# Altium PCB MICRO.PcbDoc
Units mm, origin at the board's own origin, x right, y up, seen from the top; angles counter-clockwise.
Board outline 122.31 x 71.26 mm, 2 copper layers (Top Layer, Bottom Layer); 42 components, 72 nets, 159 pads, 0 vias.
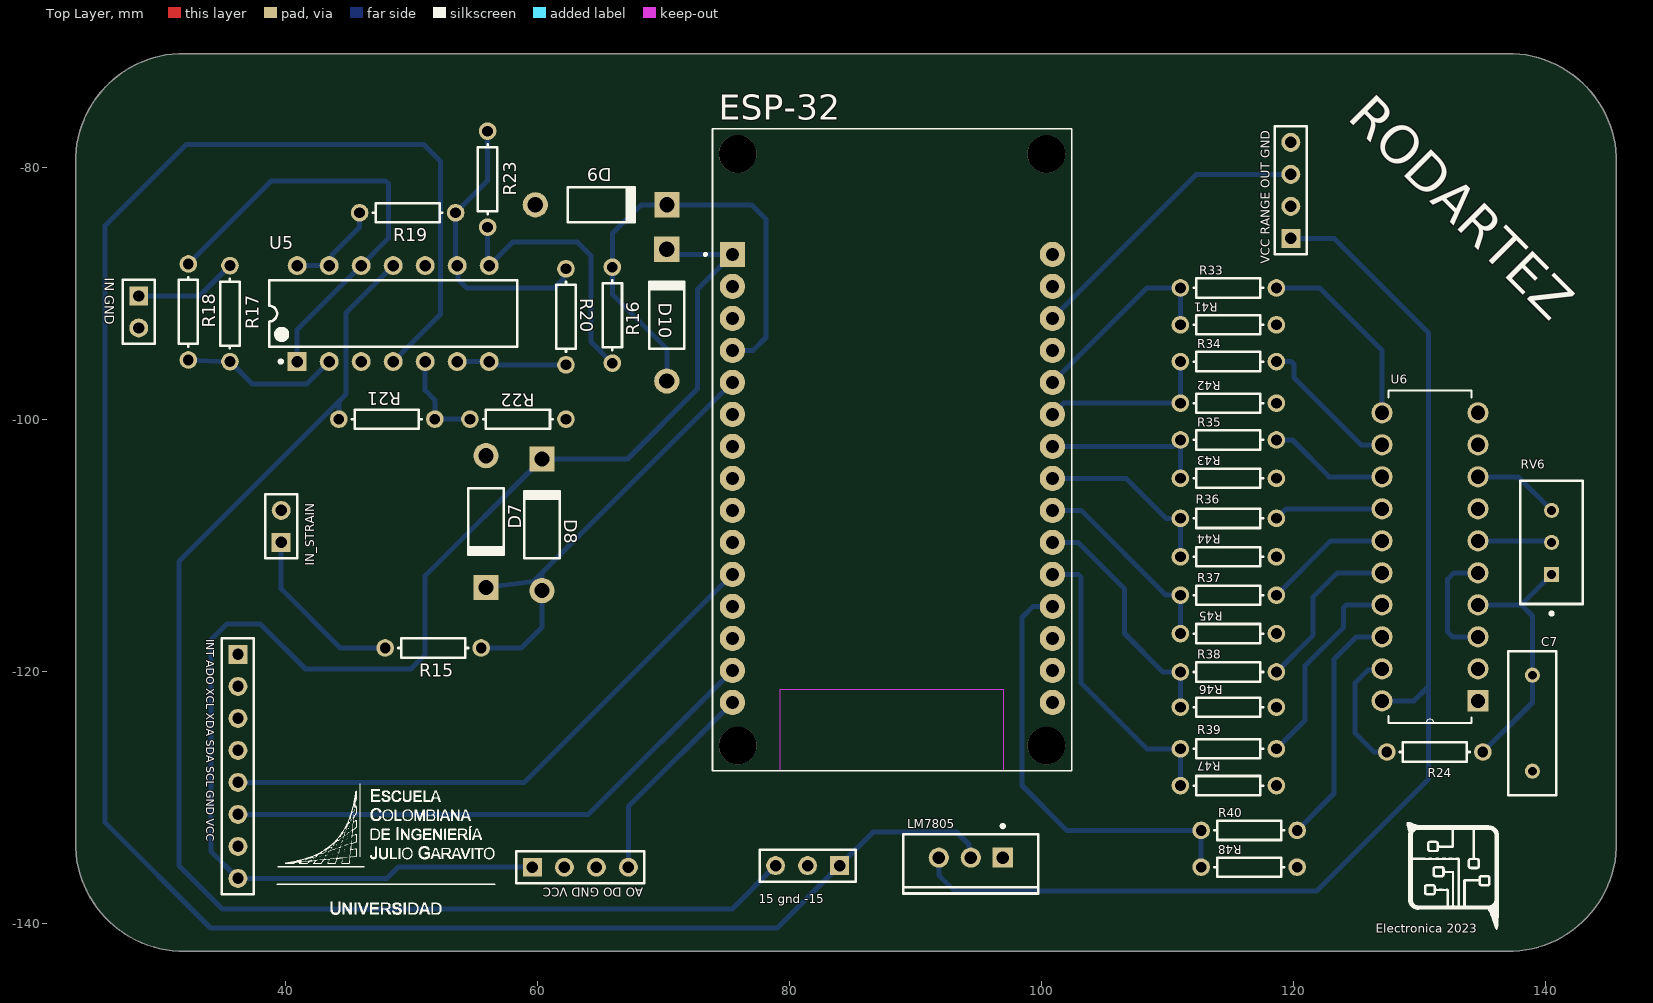
[diagram p0: Top Layer view]
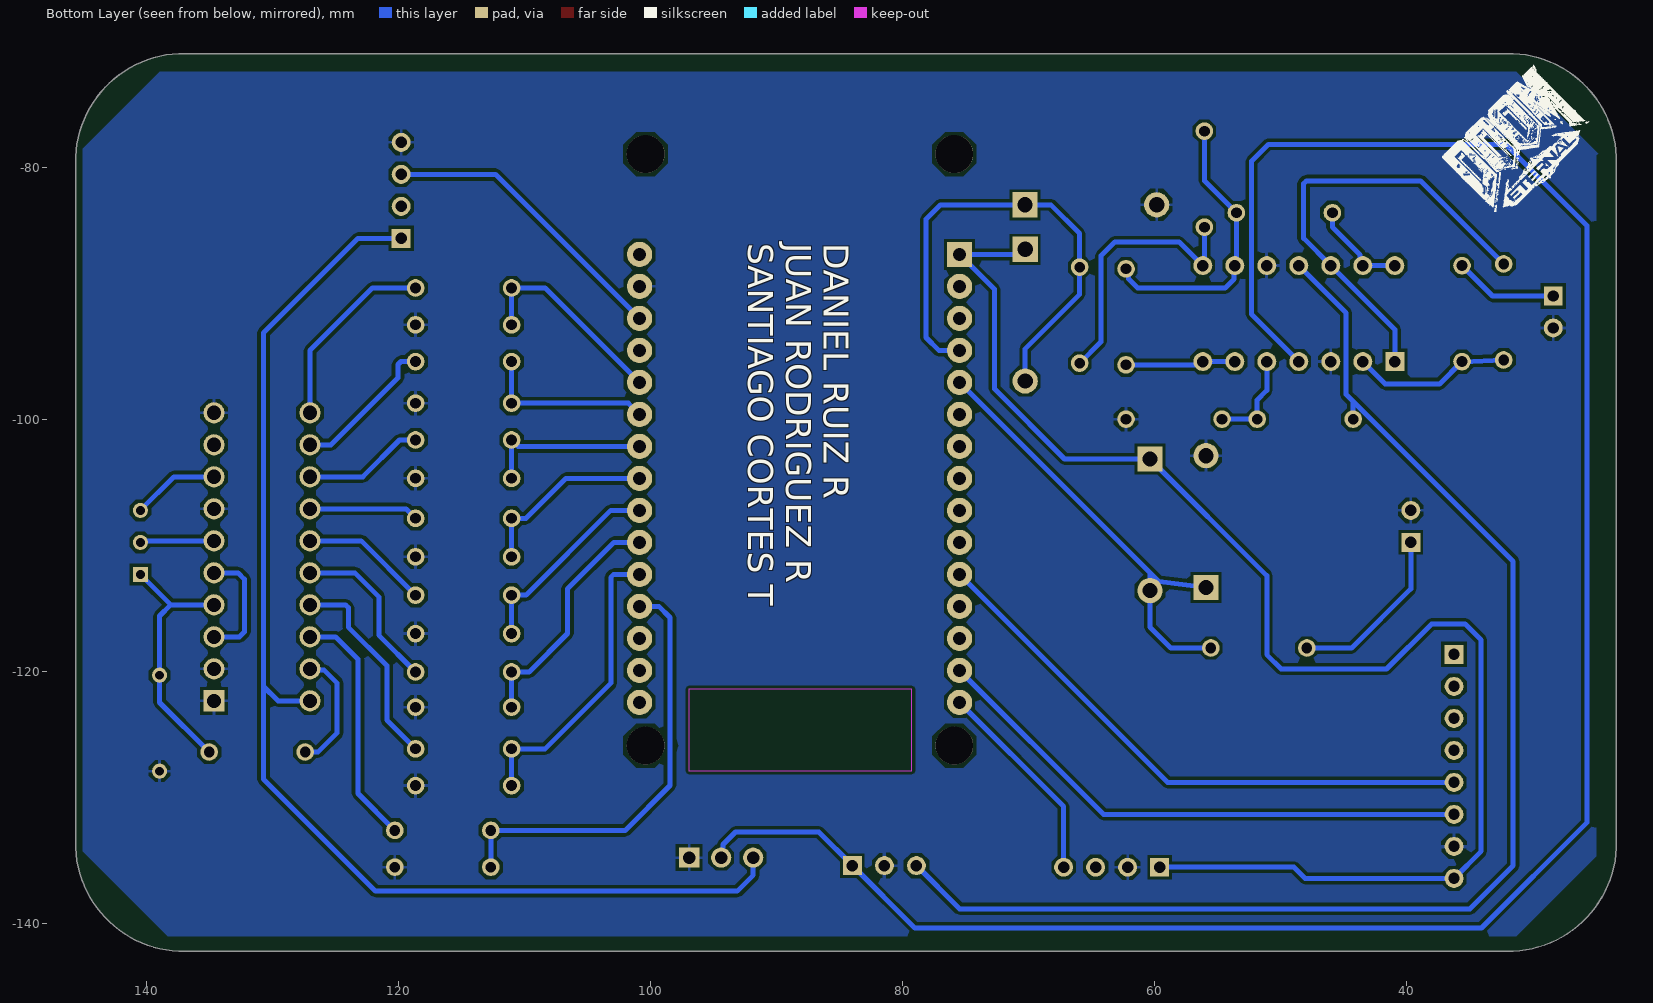
[diagram p1: Bottom Layer view, seen from below]

## Layer stack, top to bottom
Top Solder: solder mask 0.0102, Solder Resist, Dk 3.5
Top Layer: signal copper 0.0356
Dielectric 1: dielectric 0.32, FR-4, Dk 4.8
Bottom Layer: signal copper 0.0356
Bottom Solder: solder mask 0.0102, Solder Resist, Dk 3.5

## Board outline
23.303,-133.478 ccw(c31.877,-133.604) 32.003,-142.178 136.907,-142.178 136.907,-142.181 ccw(c137.033,-133.604) 145.61,-133.478 145.61,-79.628 145.607,-79.628 ccw(c137.033,-79.502) 136.907,-70.928 136.904,-70.925 32.003,-70.925 ccw(c31.877,-79.502) 23.3,-79.628 23.3,-131.445 23.303,-131.448

## Design rules (kind name [scope] priority, off if disabled: settings)
Clearance Clearance_1 [All] p1: gap=0.25 ignorepadtopadclearanceinfootprint=FALSE
Clearance Clearance_GND [InNet('GND') vs InNet('GND')] p2: gap=0.25 ignorepadtopadclearanceinfootprint=FALSE
PolygonConnect [All] p1: connectstyle=Relief reliefconductorwidth=0.254 reliefentries=4 polygonreliefangle="90 Angle" airgapwidth=0.254
RoomDefinition [InComponentClass('Room Definition1') vs False] p1: confinementstyle=ConfineIn formatcopy=TRUE lockcomponents=FALSE outline 31.242,-72.39 24.765,-78.867 24.765,-134.493 31.242,-140.97 138.303,-140.97 145.034,-134.239 145.034,-78.486 138.938,-72.39
RoutingLayers [All] p1: top layer_v5=FALSE bottom layer_v5=TRUE
RoutingVias [All] p1: holewidth=0.711 width=1.27 viastyle="Through Hole" minholewidth=0.711 minwidth=1.27 maxholewidth=0.711 maxwidth=1.27
SolderMaskExpansion [All] p1: expansion=0.102 istentingtop=FALSE
Width [All] p1: maxlimit=1 minlimit=0.254 preferedwidth=0.4 minimp=50.000000 maximp=50.000000 favimp=50.000000
29 further rules are at their usual default settings.

## Classes and differential pairs
component class "Room Definition1": "15 gnd -15" "AO DO GND VCC" D7 D8 D9 D10 ESP-32 "IN GND" IN_STRAIN "INT ADO XCL XDA SDA SCL GND VCC" LM7805 R15 R16 R17 R18 R19 R20 R21 R22 R23 R24 R33 R34 R35 R36 R37 R38 R39 R41 R42 R43 R44 R45 R46 R47 R48 RV6 U5 "VCC RANGE OUT GND"
component class Micro: "15 gnd -15" "AO DO GND VCC" D7 D8 D9 D10 ESP-32 "IN GND" IN_STRAIN "INT ADO XCL XDA SDA SCL GND VCC" LM7805 R15 R16 R17 R18 R19 R20 R21 R22 R23 R24 R33 R34 R35 R36 R37 R38 R39 R41 R42 R43 R44 R45 R46 R47 R48 RV6 U5 "VCC RANGE OUT GND"

## Components (designator, comment, footprint, x,y, rotation, side; value= is the part's Value field where it differs from the comment)
"15 gnd -15" "Header 3" HDR1X3 83.947,-135.382 r180 top
"AO DO GND VCC" "Header 4" HDR1X4 59.563,-135.509 r0 top (schematic designator ENCODER)
C7 "Cap" RAD-0.3 138.938,-124.079 r270 top value=100pF
D7 "Diode 1N4004" DO-41 55.88,-108.077 r270 top
D8 "Diode 1N4004" DO-41 60.325,-108.331 r90 top
D9 "Diode 1N4004" DO-41 65.024,-82.931 r0 top
D10 "Diode 1N4004" DO-41 70.231,-91.694 r90 top
ESP-32 "ESP32-DEVKIT-V1" MODULE_ESP32_DEVKIT_V1 88.138,-102.383 r0 top (schematic designator U4)
"IN GND" "Header 2" HDR1X2 28.321,-90.17 r270 top (schematic designator IN_NTC)
IN_STRAIN "Header 2" HDR1X2 39.624,-109.728 r90 top
"INT ADO XCL XDA SDA SCL GND VCC" "Header 8" HDR1X8 36.195,-118.618 r270 top (schematic designator IMU)
LM7805 "LM7905CT/NOPB" NDE0003A 94.361,-134.747 r180 top (schematic designator LM1)
R15 "Res1" AXIAL-0.3 51.689,-118.11 r0 top value=1K
R16 "Res1" AXIAL-0.3 65.913,-91.694 r90 top value=1K
R17 "Res1" AXIAL-0.3 35.56,-91.567 r270 top value=1K
R18 "Res1" AXIAL-0.3 32.258,-91.44 r90 top value=1K
R19 "Res1" AXIAL-0.3 49.657,-83.566 r0 top value=1K
R20 "Res1" AXIAL-0.3 62.23,-91.821 r90 top value=1K
R21 "Res1" AXIAL-0.3 48.006,-99.949 r180 top value=1K
R22 "Res1" AXIAL-0.3 58.42,-99.949 r0 top value=1K
R23 "Res1" AXIAL-0.3 56.007,-80.899 r270 top value=1K
R24 "Res1" AXIAL-0.3 131.191,-126.365 r180 top value=1K
R33 "Res1" AXIAL-0.3 114.808,-89.535 r180 top value=1.8k
R34 "Res1" AXIAL-0.3 114.808,-95.377 r180 top value=1.8k
R35 "Res1" AXIAL-0.3 114.808,-101.6 r180 top value=1.8k
R36 "Res1" AXIAL-0.3 114.808,-107.823 r180 top value=1.8k
R37 "Res1" AXIAL-0.3 114.808,-113.919 r180 top value=1.8k
R38 "Res1" AXIAL-0.3 114.808,-120.015 r180 top value=1.8k
R39 "Res1" AXIAL-0.3 114.808,-126.111 r180 top value=1.8k
R40 "Res1" AXIAL-0.3 116.459,-132.588 r180 top value=1.8k
R41 "Res1" AXIAL-0.3 114.808,-92.456 r0 top value=3.3k
R42 "Res1" AXIAL-0.3 114.808,-98.679 r0 top value=3.3k
R43 "Res1" AXIAL-0.3 114.808,-104.648 r0 top value=3.3k
R44 "Res1" AXIAL-0.3 114.808,-110.871 r0 top value=3.3k
R45 "Res1" AXIAL-0.3 114.808,-116.967 r0 top value=3.3k
R46 "Res1" AXIAL-0.3 114.808,-122.809 r0 top value=3.3k
R47 "Res1" AXIAL-0.3 114.808,-129.032 r0 top value=3.3k
R48 "Res1" AXIAL-0.3 116.459,-135.509 r0 top value=3.3k
RV6 "3296W-1-504LF" FP-3296W-MFG 140.457,-109.728 r270 top value=725
U5 "LF347N" N0014A 48.514,-91.567 r90 top
U6 "ADC0804LCN" DIP254P762X508-20 127,-99.441 r180 top
"VCC RANGE OUT GND" "Header 4" HDR1X4 119.761,-85.598 r90 top (schematic designator ultrasonido)

## Footprints (in the part's own frame and the unit in brackets; to place one, negate y for a bottom-side part, rotate by r counter-clockwise, add the part's x,y. Pads: shape width x height; smd on the part's side, far side on the other; paste and mask are expansions set on the pad)
AXIAL-0.3 [mm] "Axial Device, Thru-Hole; 2 Leads; 0.3 in Pin Spacing"
  round 1.4 hole 0.85: 1(-3.81,0) 2(3.81,0)
  silkscreen extent -2.77,-0.76 2.77,0.76
DIP254P762X508-20 [mil]
  rect 66x66 hole 44: 1(-300,900)
  round 66 hole 44: 2(-300,800) 3(-300,700) 4(-300,600) 5(-300,500) 6(-300,400) 7(-300,300) 8(-300,200) 9(-300,100) 10(-300,0) 11(0,0) 12(0,100) 13(0,200) 14(0,300) 15(0,400) 16(0,500) 17(0,600) 18(0,700) 19(0,800) 20(0,900)
  silkscreen extent -280,-70 -20,970
DO-41 [mm] "Diode, Axial; Body 5.2 x 2.7 mm (LxDia. max), Lead Dia. 0.86 mm (max)"
  round 2 hole 1.2: 1(-5.23,0)
  rect 2x2 hole 1.2: 2(5.23,0)
  silkscreen extent -2.65,-1.4 2.75,1.4
FP-3296W-MFG [mm]
  rect 1.2x1.2 hole 0.7 paste-2539.97 mask+0: 1(2.54,0.005)
  round 1.2 hole 0.7 paste-2539.97 mask+0: 2(0,0.005) 3(-2.54,0.005)
  silkscreen extent -4.89,-2.48 5.77,2.48, body extent -4.99,-2.58 4.99,2.58, height 0.25
HDR1X2 [mm] "Connector; Header; 2 Position"
  rect 1.5x1.5 hole 0.9: 1(0,0)
  round 1.5 hole 0.9: 2(2.54,0)
  silkscreen extent -1.27,-1.27 3.81,1.27
HDR1X3 [mm] "Connector; Header; 3 Position"
  rect 1.5x1.5 hole 0.9: 1(0,0)
  round 1.5 hole 0.9: 2(2.54,0) 3(5.08,0)
  silkscreen extent -1.27,-1.27 6.35,1.27
HDR1X4 [mm] "Connector; Header; 4 Position"
  rect 1.5x1.5 hole 0.9: 1(0,0)
  round 1.5 hole 0.9: 2(2.54,0) 3(5.08,0) 4(7.62,0)
  silkscreen extent -1.27,-1.27 8.89,1.27
HDR1X8 [mm] "Connector; Header; 8 Position"
  rect 1.5x1.5 hole 0.9: 1(0,0)
  round 1.5 hole 0.9: 2(2.54,0) 3(5.08,0) 4(7.62,0) 5(10.16,0) 6(12.7,0) 7(15.24,0) 8(17.78,0)
  silkscreen extent -1.27,-1.27 19.05,1.27
MODULE_ESP32_DEVKIT_V1 [mm]
  rect 2x2 / inner round 2 / far side rect 2x2 hole 1.02: 1(-12.7,15.515)
  round 2 hole 1.02: 2(-12.7,12.975) 3(-12.7,10.435) 4(-12.7,7.895) 5(-12.7,5.355) 6(-12.7,2.815) 7(-12.7,0.275) 8(-12.7,-2.265) 9(-12.7,-4.805) 10(-12.7,-7.345) 11(-12.7,-9.885) 12(-12.7,-12.425) 13(-12.7,-14.965) 14(-12.7,-17.505) 15(-12.7,-20.045) 16(12.7,-20.045) 17(12.7,-17.505) 18(12.7,-14.965) 19(12.7,-12.425) 20(12.7,-9.885) 21(12.7,-7.345) 22(12.7,-4.805) 23(12.7,-2.265) 24(12.7,0.275) 25(12.7,2.815) 26(12.7,5.355) 27(12.7,7.895) 28(12.7,10.435) 29(12.7,12.975) 30(12.7,15.515)
  round 3 hole 3 unplated: ""(-12.28,-23.475) ""(-12.28,23.475) ""(12.23,-23.475) ""(12.23,23.475)
  Keep-Out Layer region: 8.78,-25.475 -8.91,-25.475 -8.91,-18.985 8.78,-18.985
  Keep-Out Layer region: 8.78,-25.475 -8.91,-25.475 -8.91,-18.985 8.78,-18.985
  silkscreen extent -14.95,-25.47 14.23,25.47
N0014A [mm] "DIP, 14-Leads, Body 19.7x6.6mm, Pitch 2.54mm"
  rect 1.5x1.5 hole 0.9: 1(-3.81,7.62)
  round 1.5 hole 0.9: 2(-3.81,5.08) 3(-3.81,2.54) 4(-3.81,0) 5(-3.81,-2.54) 6(-3.81,-5.08) 7(-3.81,-7.62) 8(3.81,-7.62) 9(3.81,-5.08) 10(3.81,-2.54) 11(3.81,0) 12(3.81,2.54) 13(3.81,5.08) 14(3.81,7.62)
  silkscreen extent -3.93,-9.85 2.65,9.85, body extent -3.95,-9.85 3.95,9.85, height 5.08
NDE0003A [mm] "FM, 3-Leads, Body 10.7x4.7mm, Pitch 2.54mm"
  rect 1.6x1.6 hole 1: 1(-2.54,0)
  round 1.6 hole 1: 2(0,0) 3(2.54,0)
  silkscreen extent -5.35,-2.62 5.35,2.85, body extent -5.4,-1.9 5.4,2.9, height 19.4
RAD-0.3 [mm] "Radial Cap, Thru-Hole; 2 Leads; 0.3 in Pin Spacing"
  round 1.2 hole 0.7: 1(-3.81,0) 2(3.81,0)
  silkscreen extent -5.71,-1.91 5.71,1.91

## Part data
"15 gnd -15": "Header, 3-Pin", LatestRevisionDate=17-Jul-2002, LatestRevisionNote="Re-released for DXP Platform.", Publisher="Altium Limited"
"AO DO GND VCC" "VCC RANGE OUT GND": "Header, 4-Pin", LatestRevisionDate=17-Jul-2002, LatestRevisionNote="Re-released for DXP Platform.", Publisher="Altium Limited"
C7: "Capacitor", LatestRevisionDate=17-Jul-2002, LatestRevisionNote="Re-released for DXP Platform.", PackageDescription="Radial Cap, Thru-Hole; 2 Leads; 0.3 in Pin Spacing", PackageReference=RAD-0.3, Published=8-Jun-2000, Publisher="Altium Limited"
D7 D8 D9 D10: "1 Amp General Purpose Rectifier", Code_JEDEC=DO-204-AL, ComponentLink1Description="Manufacturer Link", ComponentLink1URL=http://www.fairchildsemi.com/, ComponentLink2Description=Datasheet, ComponentLink2URL=http://www.fairchildsemi.com/ds/1N%2F1N4001.pdf, DatasheetVersion=1998, LatestRevisionDate=17-Jul-2002, LatestRevisionNote="Re-released for DXP Platform.", PackageDescription="Diode, Axial; Body 5.2 x 2.7 mm (LxDia. max), Lead Dia. 0.86 mm (max)", PackageReference=DO-41, PackageVersion=Aug-1999, Published=8-Jun-2000, Publisher="Altium Limited"
ESP-32: "Dual core, Wi-Fi: 2.4 GHz up to 150 Mbits/s,BLE (Bluetooth Low Energy) and legacy Bluetooth, 32 bits, Up to 240 MHz", Package=None, Availability="Not in stock", Check_prices=https://www.snapeda.com/parts/ESP32-DEVKIT-V1/Do+it/view-part/?ref=eda, MF="Do it", MP=ESP32-DEVKIT-V1, Price=None, SnapEDA_Link=https://www.snapeda.com/parts/ESP32-DEVKIT-V1/Do+it/view-part/?ref=snap
"IN GND" IN_STRAIN: "Header, 2-Pin", LatestRevisionDate=17-Jul-2002, LatestRevisionNote="Re-released for DXP Platform.", Publisher="Altium Limited"
"INT ADO XCL XDA SDA SCL GND VCC": "Header, 8-Pin", LatestRevisionDate=17-Jul-2002, LatestRevisionNote="Re-released for DXP Platform.", Publisher="Altium Limited"
LM7805: library part CMP-0062-02481-3, "3-Terminal Negative Regulator, 3-pin TO-220, Pb-Free", Manufacturer="Texas Instruments", PackageTopMarking=NSUZXYTTE#*LM7905CT, PowerWise=N, ComponentLink1Description="Datasheet URL", ComponentLink1URL=http://www.ti.com/general/docs/lit/getliterature.tsp?genericPartNumber=LM7905&fileType=pdf, CompType="LDO IC", PackageDescription="TO-220, Molded, 3 Lead, Straight", PackageReference=NDE0003A, PinCount=3, RoHS=Y
R15 R16 R17 R18 R19 R20 R21 R22 R23 R24 R33 R34 R35 R36 R37 R38 R39 R40 R41 R42 R43 R44 R45 R46 R47 R48: "Resistor", LatestRevisionDate=17-Jul-2002, LatestRevisionNote="Re-released for DXP Platform.", PackageDescription="Axial Device, Thru-Hole; 2 Leads; 0.3 in Pin Spacing", PackageReference=AXIAL-0.3, Published=8-Jun-2000, Publisher="Altium Limited"
RV6: library part CMP-2000-05583-2, "TRIMMER 500K OHM 0.5W PC PIN TOP", Manufacturer=Bourns, Package=3296W, Power Rating=0.5W, Resistance=1k, Temperature="-55°C to +125°C", Temperature Coefficient=100ppm/°C, Temperature Range High=+125°C, Temperature Range Low=-55°C, Tolerance=10%, Voltage Rating=300V, Automotive=No, Category=Res, ComponentLink2Description=Datasheet, ComponentLink2URL=https://www.bourns.com/docs/Product-Datasheets/3296.pdf, Device Class L1="Passive Components", Device Class L2=Resistors, Device Class L3="Variable Resistors and Potentiometers", Digikey Description="TRIMMER 500K OHM 0.5W PC PIN TOP", Height=12.05mm, Lead Free=Yes, Manufacturer Part Number=3296W-1-504LF, Mouser Description="Trimmer; Cermet; Rest 500 Kilohms; PCB; 25 Turns; Pwr-Rtg 0.5W", Octopart=https://octopart.com/3296w-1-504lf-bourns-143884, RoHS=TRUE, Series="Trimpot 3296-Sealed", Standoff Height=0.38mm
U5: library part CMP-0055-00229-3, "Wide Bandwidth Quad JFET Input Operational Amplifier, 14-pin MDIP", Manufacturer="Texas Instruments", Package Reference=N0014A, PackageTopMarking=NSUZXYYTTE#*LF347N, PowerWise=N, Code_JEDEC=MS-001-AA, ComponentLink1Description="Datasheet URL", ComponentLink1URL=http://www.ti.com/general/docs/lit/getliterature.tsp?genericPartNumber=LF347&fileType=pdf, CompType=Amplifiers, PackageDescription="MDIP, .750 x .250 x.130in, 14 Lead, .100in Pitch", PinCount=14, RoHS=N
U6: "8 Bit Analog to Digital Converter 1 Input 1 SAR 20-DIP", Package="DIP-20 Texas Instruments", Availability=Unavailable, MF="Renesas Electronics", MP=ADC0804LCN, Price=None, SnapEDA_Link=https://www.snapeda.com/parts/ADC0804LCN/Renesas%20Electronics%20America%20Inc./view-part/28050/?ref=snap

## Nets (pads, with @x,y where several pads share a name; then routed paths per layer and width w, separated by ;. In a path a pad name is that pad's centre, name@x,y a point inside that pad or via, vN(x,y) a via of type N, cw(c..) or ccw(c..) an arc to the next point about the centre after c; other vN are vias at no path point)
0: ESP-32.19 R40.2 R48.1 | length 34.7
  Bottom Layer w0.4: ESP-32.19 99.314,-114.808 98.425,-115.697 98.425,-125.693 ccw(c100.368,-125.858) 98.425,-126.023 98.425,-129.032 101.981,-132.588 R40.2 R48.1
1: ESP-32.20 R39.2 R47.1 | length 23.7
  Bottom Layer w0.4: ESP-32.20 102.89,-112.268 103.124,-112.502 103.124,-120.904 108.331,-126.111 R39.2 R47.1
2: ESP-32.21 R38.2 R46.1 | length 19.3
  Bottom Layer w0.4: ESP-32.21 102.87,-109.728 106.553,-113.411 106.553,-116.967 109.601,-120.015 R38.2 R46.1
2x: D9.2 D10.1 ESP-32.4 R16.2 | length 39.6
  Bottom Layer w0.4: D10.1 70.231,-94.361 65.913,-90.043 R16.2 65.913,-85.217 68.199,-82.931 D9.2 76.962,-82.931 78.105,-84.074 78.105,-93.472 77.089,-94.488 ESP-32.4
3: ESP-32.22 R37.2 R45.1 | length 16
  Bottom Layer w0.4: ESP-32.22 103.124,-107.188 109.855,-113.919 R37.2 R45.1
4: ESP-32.23 R36.2 R44.1 | length 14.5
  Bottom Layer w0.4: ESP-32.23 106.68,-104.648 109.855,-107.823 R36.2 R44.1
4x: D7.2 D8.1 ESP-32.5 R15.2 | length 36
  Bottom Layer w0.4: R15.2 58.674,-118.11 60.325,-116.459 D8.1 60.325,-112.141 ; D7.2 59.615,-112.851 60.325,-112.141 ; ESP-32.5 60.325,-112.141
5: ESP-32.24 R35.2 R43.1 | length 13.4
  Bottom Layer w0.4: ESP-32.24 110.49,-102.108 R35.2 R43.1
6: ESP-32.25 R34.2 R42.1 | length 13.8
  Bottom Layer w0.4: ESP-32.25 101.727,-98.679 R42.1 R34.2
7: ESP-32.26 R33.2 R41.1 | length 16.2
  Bottom Layer w0.4: ESP-32.26 108.331,-89.535 R33.2 R41.1
13: "VCC RANGE OUT GND.3" ESP-32.28 | length 23.7
  Bottom Layer w0.4: ESP-32.28 112.268,-80.518 119.761,-80.518
21: "INT ADO XCL XDA SDA SCL GND VCC.5" ESP-32.11 | length 46.1
  Bottom Layer w0.4: 36.195,-128.778 58.928,-128.778 ESP-32.11
22: "INT ADO XCL XDA SDA SCL GND VCC.6" ESP-32.14 | length 44
  Bottom Layer w0.4: 36.195,-131.318 64.008,-131.318 ESP-32.14
23: "AO DO GND VCC.4" ESP-32.15 | length 16.5
  Bottom Layer w0.4: 67.183,-135.509 67.183,-130.683 ESP-32.15
+5: "VCC RANGE OUT GND.1" LM7805.3 U6.20 | length 98.1
  Bottom Layer w0.4: LM7805.3 91.821,-136.144 93.091,-137.414 121.793,-137.414 130.683,-128.524 130.683,-121.158 ; 119.761,-85.598 123.19,-85.598 130.683,-93.091 130.683,-121.158 ; U6.20 129.54,-122.301 130.683,-121.158
GND: "15 gnd -15.2" "AO DO GND VCC.2" "IN GND.2" "INT ADO XCL XDA SDA SCL GND VCC.7" "VCC RANGE OUT GND.4" C7.2 D7.1 D9.1 ESP-32.29 IN_STRAIN.2 LM7805.1 R22.2 R41.2 R42.2 R43.2 R44.2 R45.2 R46.2 R47.2 R48.2 U5.3 U5.10 U6.1 U6.2 U6.7 U6.10
NetC1_1: 
NetC2_2: 
NetC5_1: 
NetC6_2: 
NetC7_1: C7.1 R24.1 RV6.1 U6.4 | length 20.5
  Bottom Layer w0.4: U6.4 138.049,-114.681 ; R24.1 138.938,-122.428 C7.1 138.938,-115.57 138.049,-114.681 ; RV6.1 138.049,-114.681
NetD1_2: 
NetD3_2: 
NetIN/OUT_1: 
NetIN_NTC_1: "IN GND.1" R17.1 | length 8.2
  Bottom Layer w0.4: 28.321,-90.17 33.147,-90.17 R17.1
NetIN_STRAIN_1: IN_STRAIN.1 R15.1 | length 13.9
  Bottom Layer w0.4: IN_STRAIN.1 39.624,-113.411 44.323,-118.11 R15.1
NetLM7805_3: 
NetMO-in_3: 
NetMO-in_4: 
NetMO_out_2: 
NetMO_out_3: 
NetMO_out_4: 
NetNTC_1: 
NetNTC_2: 
NetP_galga_4: 
NetR2_1: 
NetR3_1: 
NetR3_2: 
NetR4_2: 
NetR5_1: 
NetR6_1: 
NetR7_1: 
NetR9_1: 
NetR10_2: 
NetR11_1: 
NetR11_2: 
NetR12_1: 
NetR16_1: R16.1 R23.2 U5.8 | length 21.6
  Bottom Layer w0.4: R23.2 56.007,-87.63 U5.8 58.014,-85.877 63.119,-85.877 64.211,-86.97 64.211,-93.802 R16.1
NetR17_2: R17.2 R18.1 U5.2 | length 12.7
  Bottom Layer w0.4: R18.1 35.543,-95.394 R17.2 37.338,-97.155 41.656,-97.155 U5.2
NetR18_2: R18.2 U5.1 U5.12 | length 35.8
  Bottom Layer w0.4: R18.2 38.862,-81.026 47.899,-81.026 48.133,-81.26 48.133,-85.598 U5.12 40.894,-92.837 U5.1
NetR19_1: R19.1 U5.13 U5.14 | length 7.7
  Bottom Layer w0.4: U5.14 U5.13 43.644,-87.547 43.644,-86.912 45.847,-84.709 R19.1
NetR19_2: R19.2 R20.2 R23.1 U5.9 | length 22.7
  Bottom Layer w0.4: R23.1 56.007,-81.026 R19.2 53.467,-87.63 53.641,-87.804 53.641,-88.82 54.356,-89.535 61.305,-89.535 62.039,-88.802 62.039,-88.202 R20.2
NetR20_1: R20.1 U5.6 U5.7 | length 8.7
  Bottom Layer w0.4: U5.6 U5.7 56.388,-95.631 R20.1
NetR21_1: R21.1 R22.1 U5.5 | length 7.7
  Bottom Layer w0.4: U5.5 51.054,-97.663 51.816,-98.425 R21.1 R22.1
NetR24_2: R24.2 U6.19 | length 9.7
  Bottom Layer w0.4: U6.19 126.891,-119.87 125.875,-119.87 124.841,-120.904 124.841,-124.841 126.354,-126.354 127.37,-126.354 R24.2
NetR33_1: R33.1 U6.11 | length 15.4
  Bottom Layer w0.4: R33.1 122.047,-89.535 127,-94.488 U6.11
NetR34_1: R34.1 U6.12 | length 11.7
  Bottom Layer w0.4: R34.1 119.781,-95.377 120.015,-95.611 120.015,-96.667 125.329,-101.981 U6.12
NetR35_1: R35.1 U6.13 | length 9.6
  Bottom Layer w0.4: R35.1 119.888,-101.6 122.809,-104.521 U6.13
NetR36_1: R36.1 U6.14 | length 8.7
  Bottom Layer w0.4: R36.1 119.38,-107.061 U6.14
NetR37_1: R37.1 U6.15 | length 10.2
  Bottom Layer w0.4: R37.1 122.936,-109.601 U6.15
NetR38_1: R38.1 U6.16 | length 13.4
  Bottom Layer w0.4: R38.1 121.539,-117.094 121.539,-114.046 123.444,-112.141 U6.16
NetR39_1: R39.1 U6.17 | length 16.6
  Bottom Layer w0.4: R39.1 120.904,-123.825 120.904,-119.507 123.952,-116.459 123.952,-114.915 124.186,-114.681 U6.17
NetR40_1: R40.1 U6.18 | length 19.3
  Bottom Layer w0.4: R40.1 123.19,-129.667 123.19,-118.999 124.968,-117.221 U6.18
NetRV3_2: 
NetRV4_2: 
NetRV5_2: 
NetRV6_2: RV6.2 U6.6 | length 5.9
  Bottom Layer w0.4: U6.6 140.335,-109.601 RV6.2
NetRV6_3: RV6.3 U6.8 | length 6.9
  Bottom Layer w0.4: U6.8 137.795,-104.521 RV6.3
NetU6_3: U6.3 U6.5 | length 9.4
  Bottom Layer w0.4: U6.3 132.588,-117.221 132.207,-116.84 132.207,-112.649 132.715,-112.141 U6.5
VCC: "15 gnd -15.1" LM7805.2 U5.4 | length 171.4
  Bottom Layer w0.4: U5.4 52.273,-91.618 52.273,-79.477 50.927,-78.13 32.106,-78.13 25.654,-84.582 25.654,-131.978 34.011,-140.335 78.994,-140.335 83.947,-135.382 86.614,-132.715 93.218,-132.715 94.216,-133.713 94.216,-134.602 LM7805.2
VDD: "15 gnd -15.3" R21.2 U5.11 | length 106.3
  Bottom Layer w0.4: R21.2 44.196,-98.552 ; U5.11 44.755,-91.516 44.755,-97.993 44.196,-98.552 ; 78.867,-135.382 75.438,-138.811 34.925,-138.811 31.496,-135.382 31.496,-111.252 44.196,-98.552
VOLTAGE: "AO DO GND VCC.1" "INT ADO XCL XDA SDA SCL GND VCC.8" D8.2 D10.2 ESP-32.1 | length 114.3
  Bottom Layer w0.4: 59.563,-135.509 48.895,-135.509 48.006,-136.398 36.195,-136.398 34.036,-134.239 34.036,-117.475 35.306,-116.205 37.973,-116.205 41.549,-119.781 49.911,-119.781 51.054,-118.638 51.054,-112.372 D8.2 67.104,-103.101 72.669,-97.536 72.669,-89.637 ESP-32.1 70.635,-86.868 D10.2
pads on no net: "AO DO GND VCC.3" "INT ADO XCL XDA SDA SCL GND VCC.1" "INT ADO XCL XDA SDA SCL GND VCC.2" "INT ADO XCL XDA SDA SCL GND VCC.3" "INT ADO XCL XDA SDA SCL GND VCC.4" "VCC RANGE OUT GND.2" ESP-32. ESP-32.2 ESP-32.3 ESP-32.6 ESP-32.7 ESP-32.8 ESP-32.9 ESP-32.10 ESP-32.12 ESP-32.13 ESP-32.16 ESP-32.17 ESP-32.18 ESP-32.27 ESP-32.30 U6.9

## Polygon pours and split planes (outlines as drawn)
GND on Bottom Layer "GND" (solid, pour order 0): 24.765,-78.867 24.892,-78.994 24.892,-134.62 31.242,-140.97 138.303,-140.97 145.034,-134.239 145.034,-78.486 138.938,-72.39 31.242,-72.39

## Silkscreen, mask and mechanical layers (free items; w line width, h text height)
Top Overlay:
  drawing of 59 lines, arcs and shapes, not listed
  text "RODARTEZ" at 124.166,-76.073 h3 r315
  text "Electronica 2023" at 126.509,-140.708 h0.7
Bottom Overlay:
  drawing of 71 lines, arcs and shapes, not listed
  text "DANIEL RUIZ R / JUAN RODRIGUEZ R / SANTIAGO CORTES T" at 92.202,-85.979 h2 r90
Mechanical 1:
  lines w0.254: 23.3,-131.445 23.3,-79.628 cw(c31.877,-79.502) 32.003,-70.925 135.383,-70.925 136.904,-70.925 136.907,-70.928 cw(c137.033,-79.502) 145.607,-79.628 ; 23.303,-131.448 23.303,-133.478 ccw(c31.877,-133.604) 32.003,-142.178 136.907,-142.178 ; 136.907,-142.181 ccw(c137.033,-133.604) 145.61,-133.478 145.61,-79.628

## Dimensions
145.61,-133.478 to 23.303,-133.478 on Mechanical 1
135.383,-70.925 to 136.907,-142.178 on Mechanical 1